# Altium PCB Sensor_part.PcbDoc
Units mm, origin at the board's own origin, x right, y up, seen from the top; angles counter-clockwise.
Board outline 24 x 26.16 mm, 2 copper layers (Top Layer, Bottom Layer); 7 components, 9 nets, 23 pads, 6 vias.
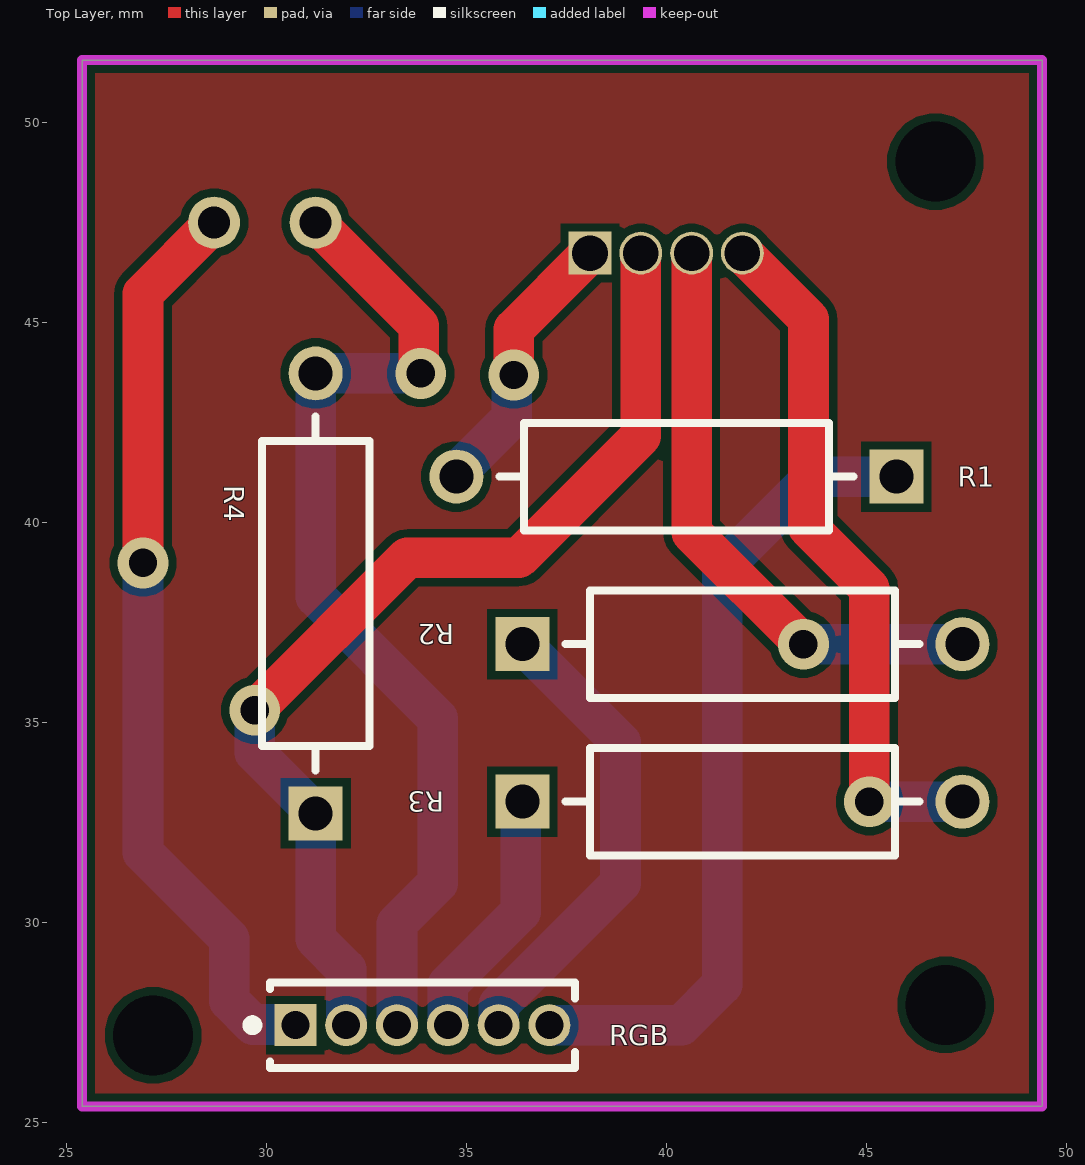
[diagram p0: Top Layer view]
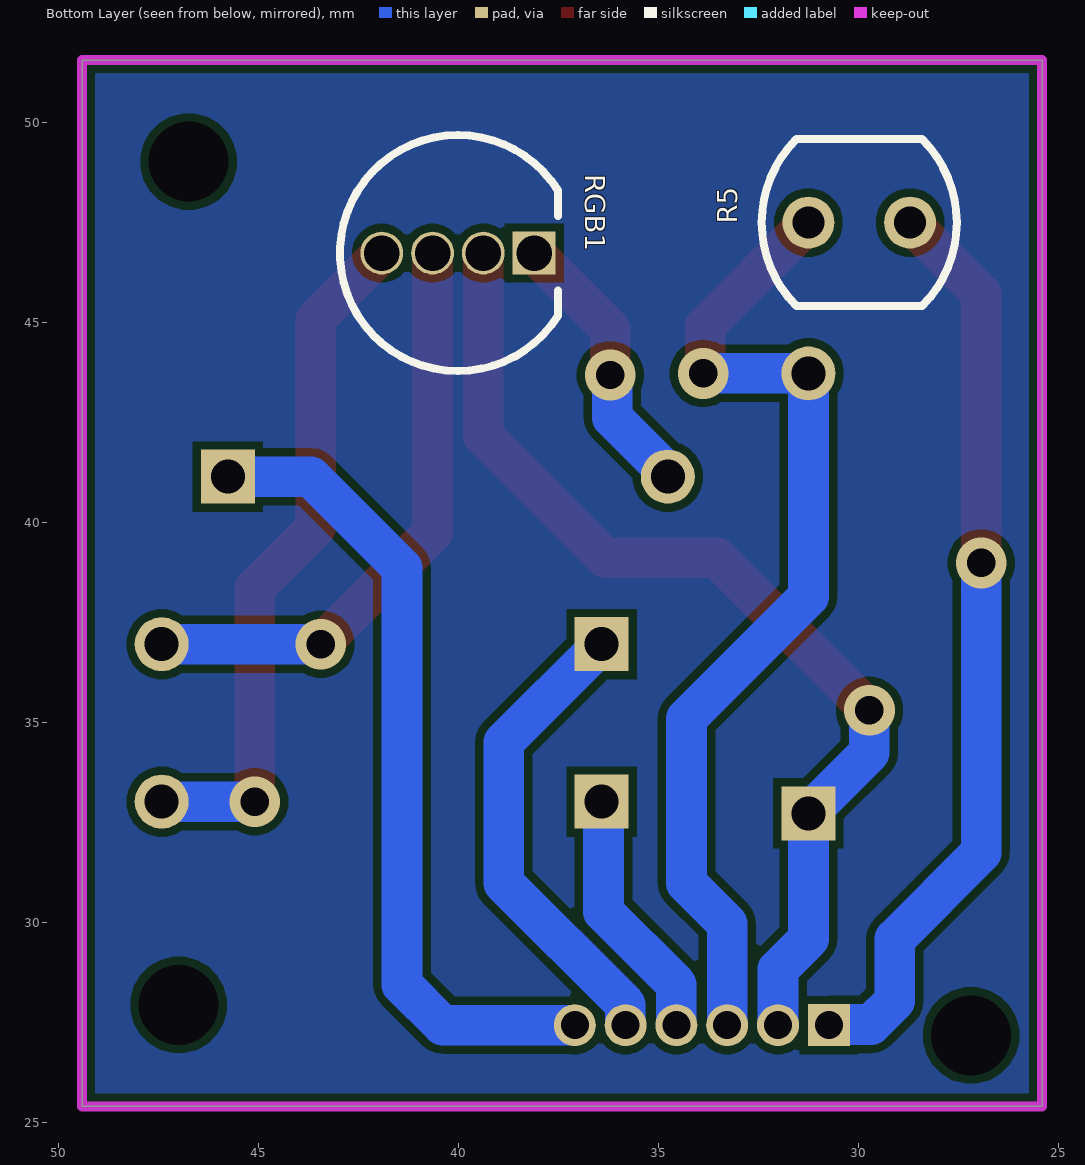
[diagram p1: Bottom Layer view, seen from below]
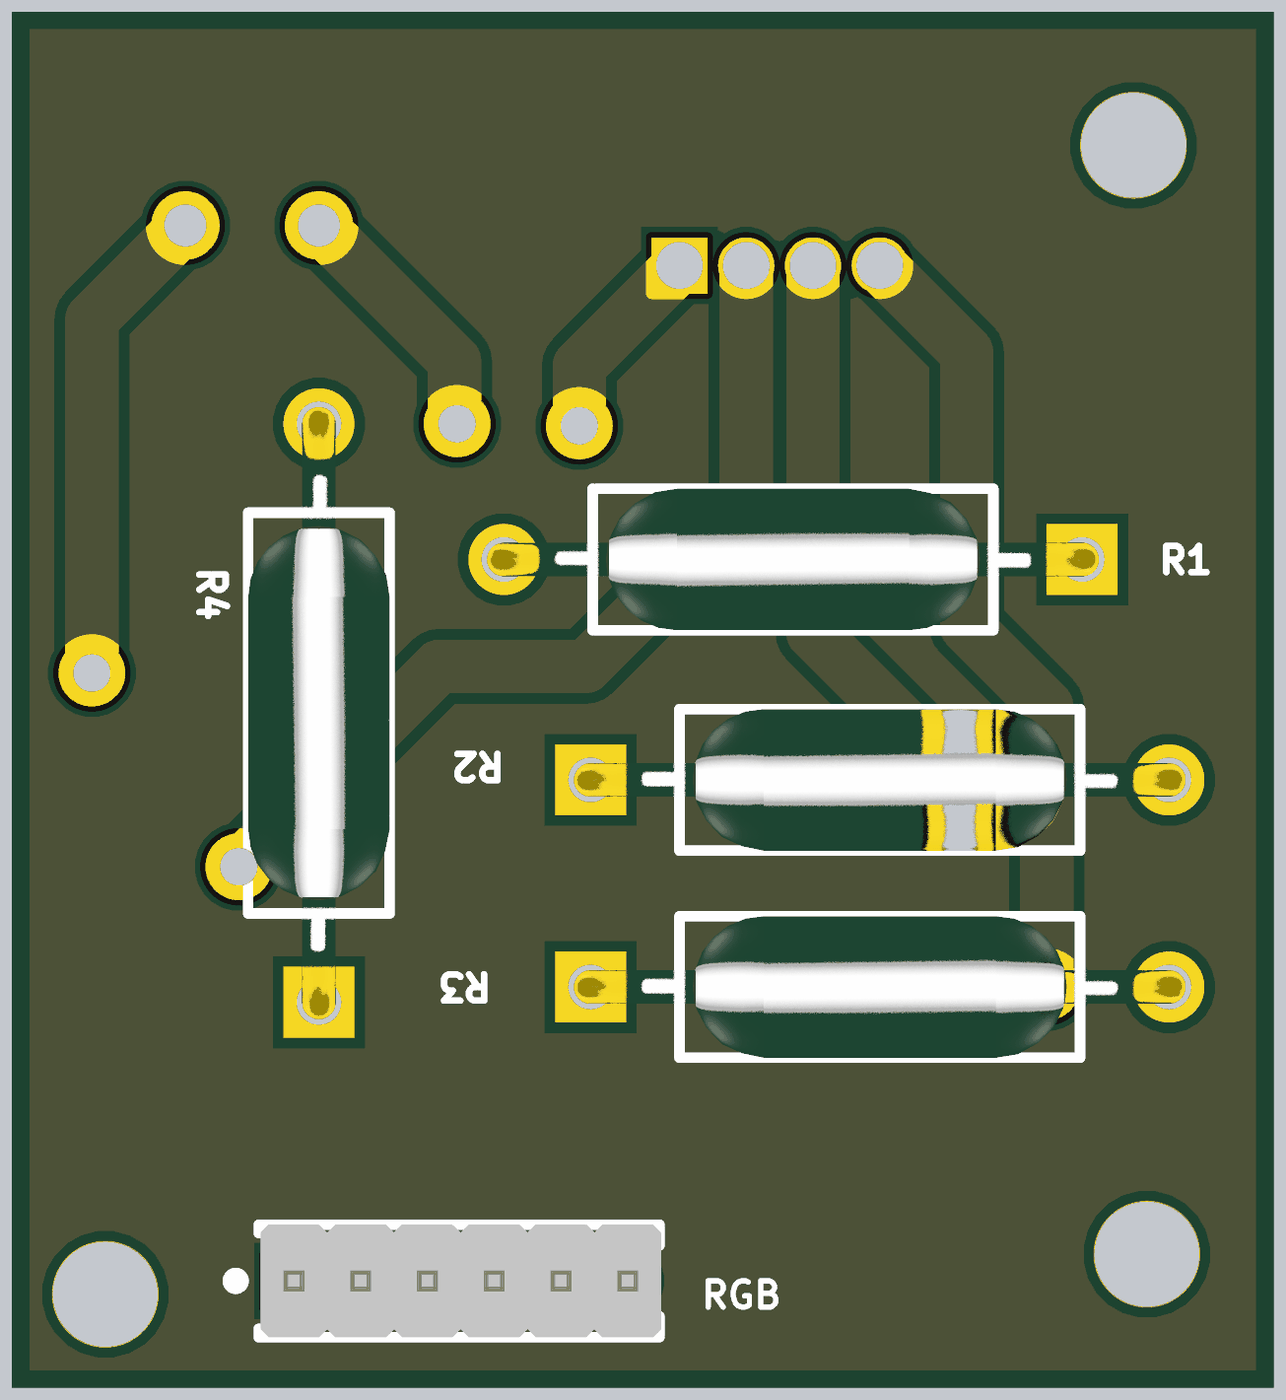
[diagram p2: 3D render of the assembled board from above, using the file's embedded part models]

## Layer stack, top to bottom
Top Solder: solder mask 0.0102, Solder Resist, Dk 3.5
Top Layer: signal copper 0.0356
Dielectric 1: dielectric 0.32, FR-4, Dk 4.8
Bottom Layer: signal copper 0.0356
Bottom Solder: solder mask 0.0102, Solder Resist, Dk 3.5

## Board outline
25.4,25.4 49.403,25.4 49.403,51.562 25.4,51.562

## Design rules (kind name [scope] priority, off if disabled: settings)
Clearance [All] p1: gap=0.2 ignorepadtopadclearanceinfootprint=FALSE
PolygonConnect [All] p1: connectstyle=Relief reliefconductorwidth=0.254 reliefentries=4 polygonreliefangle="90 Angle" airgapwidth=0.254
RoutingVias [All] p1: holewidth=0.711 width=1.27 viastyle="Through Hole" minholewidth=0.711 minwidth=1.27 maxholewidth=0.711 maxwidth=1.27
SolderMaskExpansion [All] p1: expansion=0.102 istentingtop=FALSE
Width [All] p1: maxlimit=1.016 minlimit=1.016 preferedwidth=1.016
30 further rules are at their usual default settings.

## Components (designator, comment, footprint, x,y, rotation, side; value= is the part's Value field where it differs from the comment)
R1 "RNC55H1002FSB14" FP-RNC55-MFG 40.259,41.148 r180 top value=10kΩ
R2 "RNC55H1002FSB14" FP-RNC55-MFG 41.91,36.957 r0 top value=10kΩ
R3 "RNC55H1002FSB14" FP-RNC55-MFG 41.91,33.02 r0 top value=10kΩ
R4 "RNC55H1002FSB14" FP-RNC55-MFG 31.242,38.227 r90 top value=10kΩ
R5 "VT90N1" EXCE-VT90N1 29.972,47.498 r180 bottom
RGB "GRPB061VWVN-RC" SLIN-GRPB061VWVN-RC_V 33.909,27.432 r0 top
RGB1 "WP154A4SUREQBFZGC" KING-WP154A4SUREQBFZGC_V 40.005,46.736 r270 bottom

## Footprints (in the part's own frame and the unit in brackets; to place one, negate y for a bottom-side part, rotate by r counter-clockwise, add the part's x,y. Pads: shape width x height; smd on the part's side, far side on the other; paste and mask are expansions set on the pad)
EXCE-VT90N1 [mm] "THD, 2-Leads, Body Width 4.17mm (Max), Height 2.29mm"
  round 1.3 hole 0.8: 1(-1.27,0) 2(1.27,0)
  silkscreen extent -2.44,-2.08 2.44,2.08, body extent -2.44,-2.09 2.44,2.09, height 2.29
FP-RNC55-MFG [mm]
  rect 1.35x1.35 hole 0.85 paste-1000 mask+0: 1(-5.5,0)
  round 1.35 hole 0.85 paste-1000 mask+0: 2(5.5,0)
  silkscreen extent -4.43,-1.35 4.43,1.35, body extent -6.27,-1.45 6.27,1.45, height 0.25
KING-WP154A4SUREQBFZGC_V [mm] "THD, 4-Leads, Dia 5.9mm, Pitch 1.27mm"
  rect 1.07x1.07 hole 0.889 paste+0: 1(0,1.905)
  round 1.07 hole 0.889 paste+0: 2(0,0.635) 3(0,-0.635) 4(0,-1.905)
  silkscreen extent -2.95,-2.95 2.95,2.5
SLIN-GRPB061VWVN-RC_V [mm] "Header, 6-Leads, Body 7.62x2.14mm, Pitch 1.27mm"
  rect 1.05x1.05 hole 0.7: 1(-3.175,0)
  round 1.05 hole 0.7: 2(-1.905,0) 3(-0.635,0) 4(0.635,0) 5(1.905,0) 6(3.175,0)
  silkscreen extent -4.37,-1.07 3.81,1.07, body extent -3.81,-1.07 3.81,1.07, height 4

## Part data
R1 R2 R3 R4: library part CMP-02408-000004-1, "RES 10K OHM 1/8W 1% AXIAL", Manufacturer=Vishay, Package=RNC55, Power Rating=0.125W, Resistance=10kΩ, Temperature="-65°C to +175°C", Temperature Coefficient=50ppm/°C, Temperature Range High=+175°C, Temperature Range Low=-65°C, Tolerance=1%, Voltage Rating=200V, Automotive=No, Category=Res, ComponentLink2Description=Datasheet, ComponentLink2URL=https://www.vishay.com/docs/31025/erc.pdf, Composition="Metal Film", Device Class L1="Passive Components", Device Class L2=Resistors, Device Class L3="Through-Hole Resistors", Digikey Description="RES 10K OHM 1/8W 1% AXIAL", Failure Rate=0.001%, Height=2.69mm, Ipc Land Pattern Name=RESAD1100W85L762D269, Lead Free=No, Manufacturer Part Number=RNC55H1002FSB14, Military Standard=true, Octopart=https://octopart.com/rnc55h1002fs-vishay-40848808, RoHS=FALSE, Series=RNC
R5: library part CMP-2000-07406-1, "Photoconductive Resistor, 200 kOhm, 100 V, 80 mW, -40 to 75 degC, 2-Pin THD, RoHS", Dark Resistance=200kohm, Manufacturer="Excelitas Technology", Operating Temperature Max=75°C, Operating Temperature Min=-40°C, Package Description="2-Pin Through Hole Device, Body Width 4.17 mm (Max), Height 2.29 mm", Power Rating=80mW, Resistance @ Lux=12kohm, Resistor Case Style=-, Voltage Rating=100V, Datasheet URL=http://datasheet.octopart.com/VT90N1-Excelitas-datasheet-10388451.pdf, Datasheet Version=09/2006, Manufacturer URL=http://www.excelitas.com/Pages/Index.aspx, Mounting Technology=ThroughHole, Package Reference=VT90N1, Packaging=Each, Product Range=-, SVHC=Cadmiumchloride(15-Jun-2015)
RGB: library part CMP-2000-06374-1, "Male Header, Pitch 1.27 mm, 1 x 6 Position, Height 4 mm, Tail Length 2.3 mm, -40 to 105 degC, RoHS, Bulk", Manufacturer=Sullins, Package Description="Male Header, Pitch 1.27 mm, 1 x 6 Position, Height 4 mm, Tail Length 2.3 mm", Standard Package=1, Catalog Drawings=S9014ESeriesTop, Category=Connectors,Interconnects, Connector Type=Header,Unshrouded, Contact Finish=Gold, Contact Finish Thickness=Flash, Contact Mating Length="0.118\"(3.00mm)", Contact Type=MalePin, Datasheet URL=http://www.sullinscorp.com/drawings/71_GRPB___1VWVN-RC,_10957-C.pdf, Datasheet Version="Rev. C, 12/2008", Dynamic Catalog=GRPB, Family=RectangularConnectors-Headers,MalePins, Manufacturer URL=http://www.sullinscorp.com/, Mating Products="S9010E-06-ND / -CONNHEADER.050\"6POSR/APCB / S9008E-06-ND / -CONNHEADER.050\"6POSPCBGOLD / S9005E-06-ND / -CONNHEADER.050\"6POSSMDGOLD", Mounting Technology=ThroughHole, Mounting Type=ThroughHole, Number of Positions=6, Number of Positions Loaded=All, Number of Rows=1, Other Names=S9014E-06, Package Reference=GRPB061VWVN-RC, Packaging=Bulk, Pitch="0.050\"(1.27mm)", Termination=Solder
RGB1: library part CMP-2000-07415-1, "Full Color LED Lamp, Dominant Wavelength RGB 630 / 525 / 465 nm, -40 to 85 degC, 4-Pin THD, RoHS", Color=Red,Green,Blue(RGB), Current - Test=20mA, Manufacturer=Kingbright, Millicandela Rating=1300mcdRed,1700mcdGreen,900mcdBlue, Package / Case=Radial-4Leads, Package Description="4-Pin Through Hole LED, Dia 5.9 mm, Pitch 1.27 mm", Standard Package=500, Voltage - Forward (Vf) (Typ)=1.9VRed,3.3VGreen,3.3VBlue, 3D Model="WP154A4SUREQBFZGW.sldprt /  / WP154A4SUREQBFZGW.pro /  / WP154A4SUREQBFZGW.igs /  / WP154A4SUREQBFZGW.stp", Category=Optoelectronics, Datasheet URL=https://www.kingbrightusa.com/images/catalog/spec/WP154A4SUREQBFZGC.pdf, Datasheet Version="Rev. 5A, 08/2014", Family=LEDIndication-Discrete, Height=8.60mm, Lens Style/Size=RoundwithDomedTop,5mm,T-13/4, Lens Type=Clear, Manufacturer URL=http://www.kingbright.com/, Mounting Technology=ThroughHole, Mounting Type=ThroughHole, Online Catalog=5mm,T-13/4(RGB)RoundwithDomedTopLEDLamp, Other Names="754-1615 / WP154A4SUREQBFZGC-ND", Package Reference=WP154A4SUREQBFZGC, Packaging=Bulk, Viewing Angle=50°, Wavelength - Dominant=630nm,525nm,465nm, Wavelength - Peak=645nm,515nm,460nm

## Free pads (board coordinates)
  round 1.524 hole 2: 7(46.736,49.022) 8(46.99,27.94) 9(27.178,27.178)

## Via types
v1: diameter 1.27, hole 0.711, Top Layer to Bottom Layer, 6 vias

## Nets (pads, with @x,y where several pads share a name; then routed paths per layer and width w, separated by ;. In a path a pad name is that pad's centre, name@x,y a point inside that pad or via, vN(x,y) a via of type N, cw(c..) or ccw(c..) an arc to the next point about the centre after c; other vN are vias at no path point)
+5: R5.2 RGB.1 | length 23
  Top Layer w1.016: v1(26.924,38.989) 26.924,45.72 R5.2
  Bottom Layer w1.016: v1(26.924,38.989) 26.924,31.75 29.083,29.591 29.083,28.044 29.678,27.449 30.717,27.449 RGB.1
GND: R4.1 RGB1.2 RGB.2 | length 25.9
  Top Layer w1.016: v1(29.718,35.306) 33.528,39.116 36.322,39.116 39.37,42.164 RGB1.2
  Bottom Layer w1.016: v1(29.718,35.306) 29.718,34.251 R4.1 31.242,29.591 32.004,28.829 RGB.2
NetR1_1: R1.1 RGB.6 | length 20.5
  Bottom Layer w1.016: RGB.6 40.386,27.432 41.402,28.448 41.402,38.862 43.688,41.148 R1.1
NetR1_2: R1.2 RGB1.1 | length 7
  Top Layer w1.016: v1(36.195,43.688) 36.195,44.831 RGB1.1
  Bottom Layer w1.016: R1.2 34.759,41.238 36.146,42.626 36.146,43.639 v1(36.195,43.688)
NetR2_1: R2.1 RGB.5 | length 11.8
  Bottom Layer w1.016: RGB.5 35.821,27.439 35.821,27.947 38.862,30.988 38.862,34.505 R2.1
NetR2_2: R2.2 RGB1.3 | length 14.9
  Top Layer w1.016: RGB1.3 40.64,39.751 v1(43.434,36.957)
  Bottom Layer w1.016: v1(43.434,36.957) R2.2
NetR3_1: R3.1 RGB.4 | length 6.4
  Bottom Layer w1.016: RGB.4 34.544,28.448 36.366,30.27 36.366,32.976 R3.1
NetR3_2: R3.2 RGB1.4 | length 17.4
  Top Layer w1.016: RGB1.4 43.561,45.085 43.561,39.878 45.085,38.354 v1(45.085,33.02)
  Bottom Layer w1.016: v1(45.085,33.02) R3.2
NetR4_2: R4.2 R5.1 RGB.3 | length 25.5
  Top Layer w1.016: R5.1 33.821,44.919 33.821,43.776 v1(33.87,43.727)
  Bottom Layer w1.016: RGB.3 33.274,29.972 34.29,30.988 34.29,35.099 31.242,38.147 R4.2 v1(33.87,43.727)

## Polygon pours and split planes (outlines as drawn)
no net on Top Layer "NONET_L01_P000" (solid, pour order 0): 25.527,51.435 49.276,51.435 49.276,25.527 25.527,25.527
no net on Bottom Layer "NONET_L02_P002" (solid, pour order 2): 25.527,51.435 49.276,51.435 49.276,25.527 25.527,25.527

## Keep-outs
Keep-Out Layer:
  the board outline again, w0.254